# EAGLE board PCB_Rasp_Board (EAGLE 9.7.0), part 1 of 2
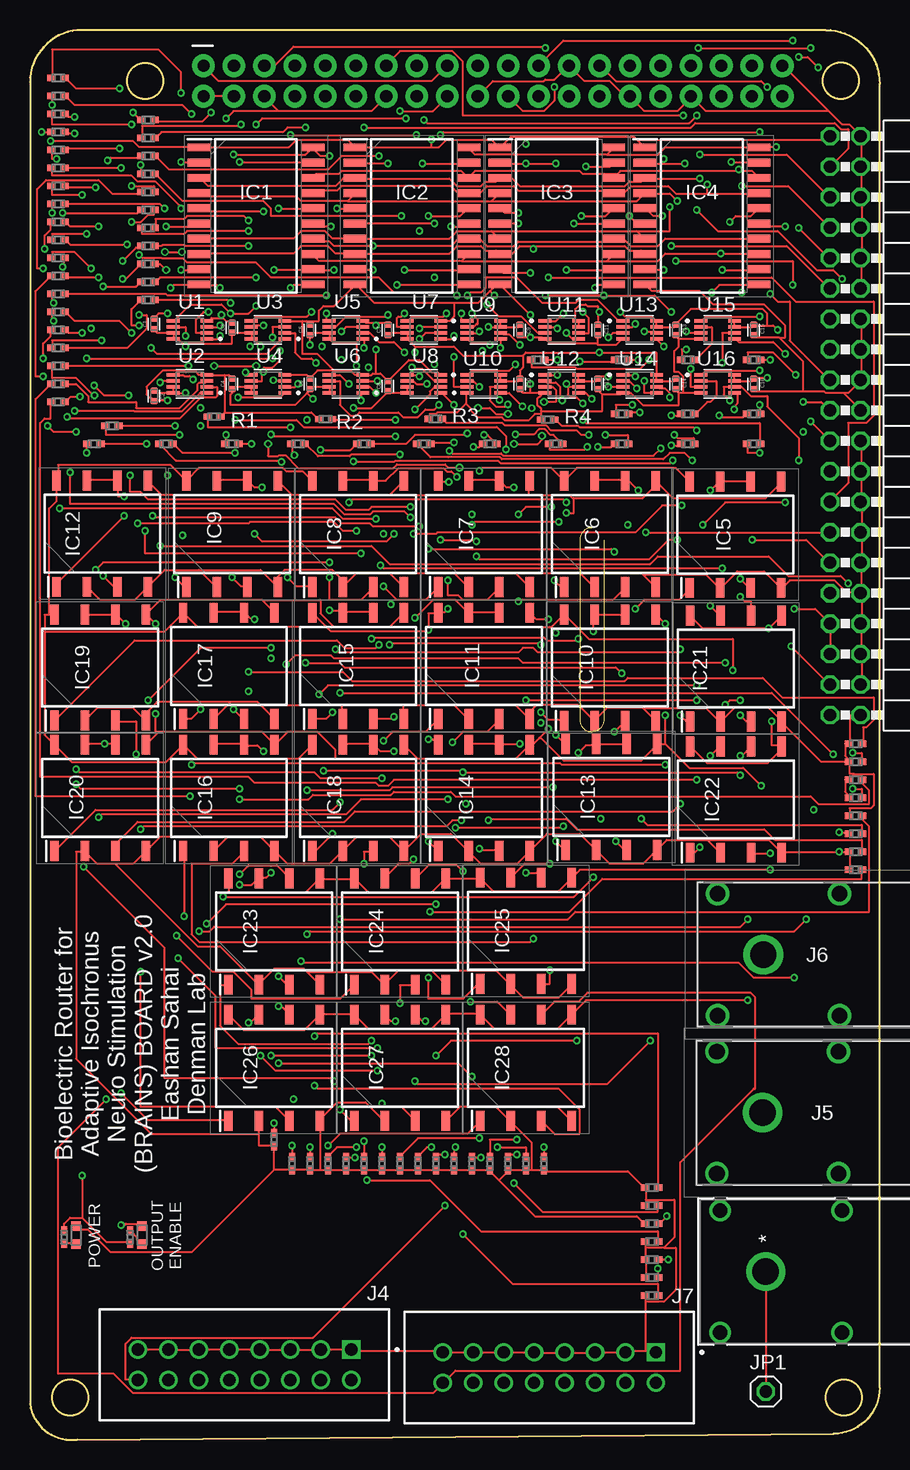
[diagram p0: board, top side]
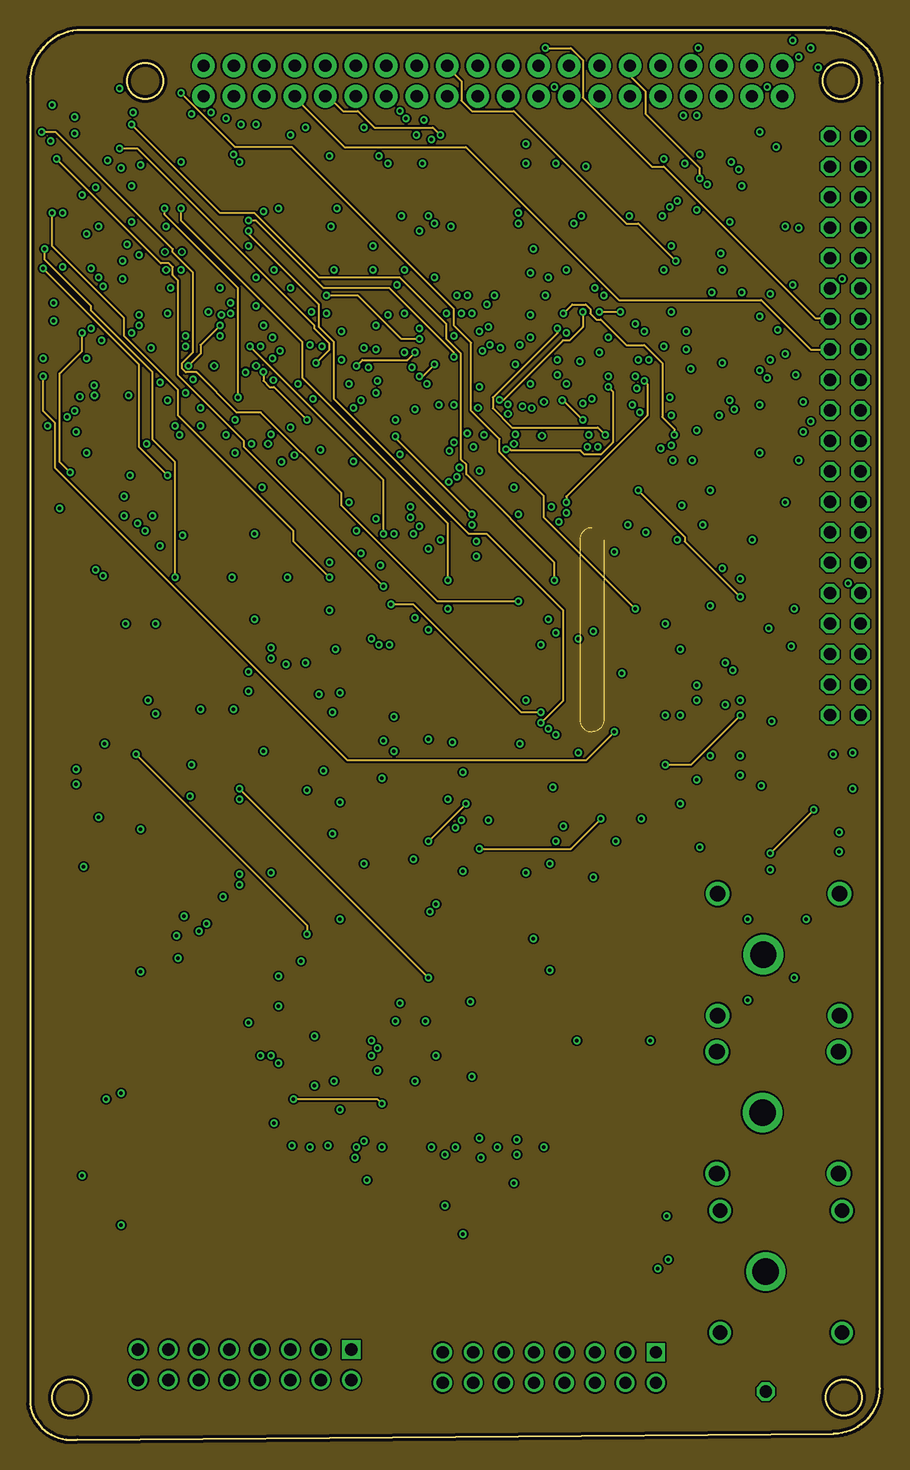
[diagram p1: board, inner layer Route2]
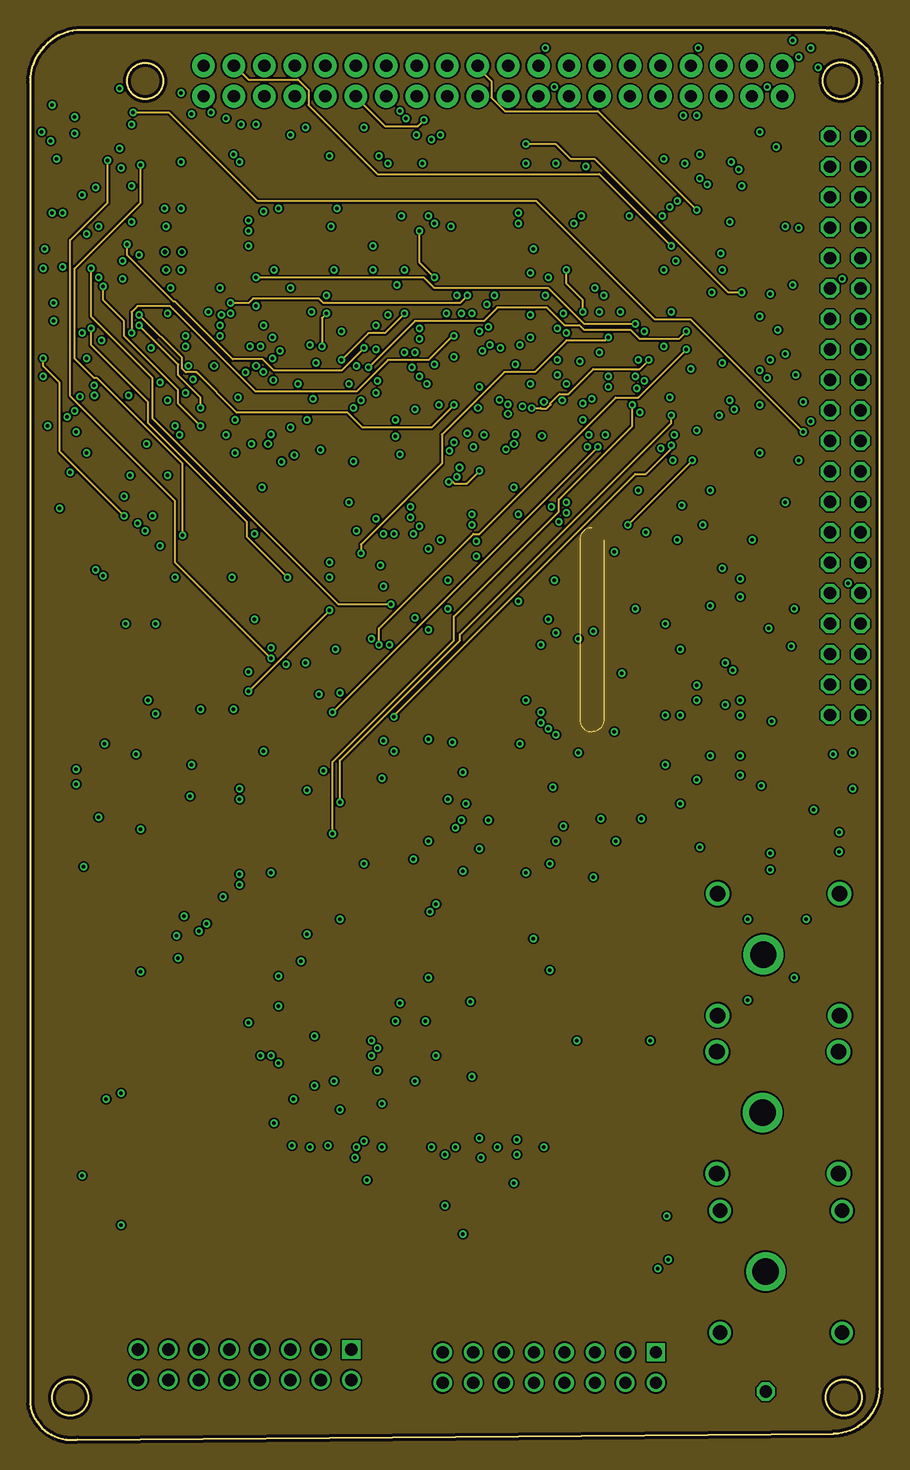
[diagram p2: board, inner layer Route15]
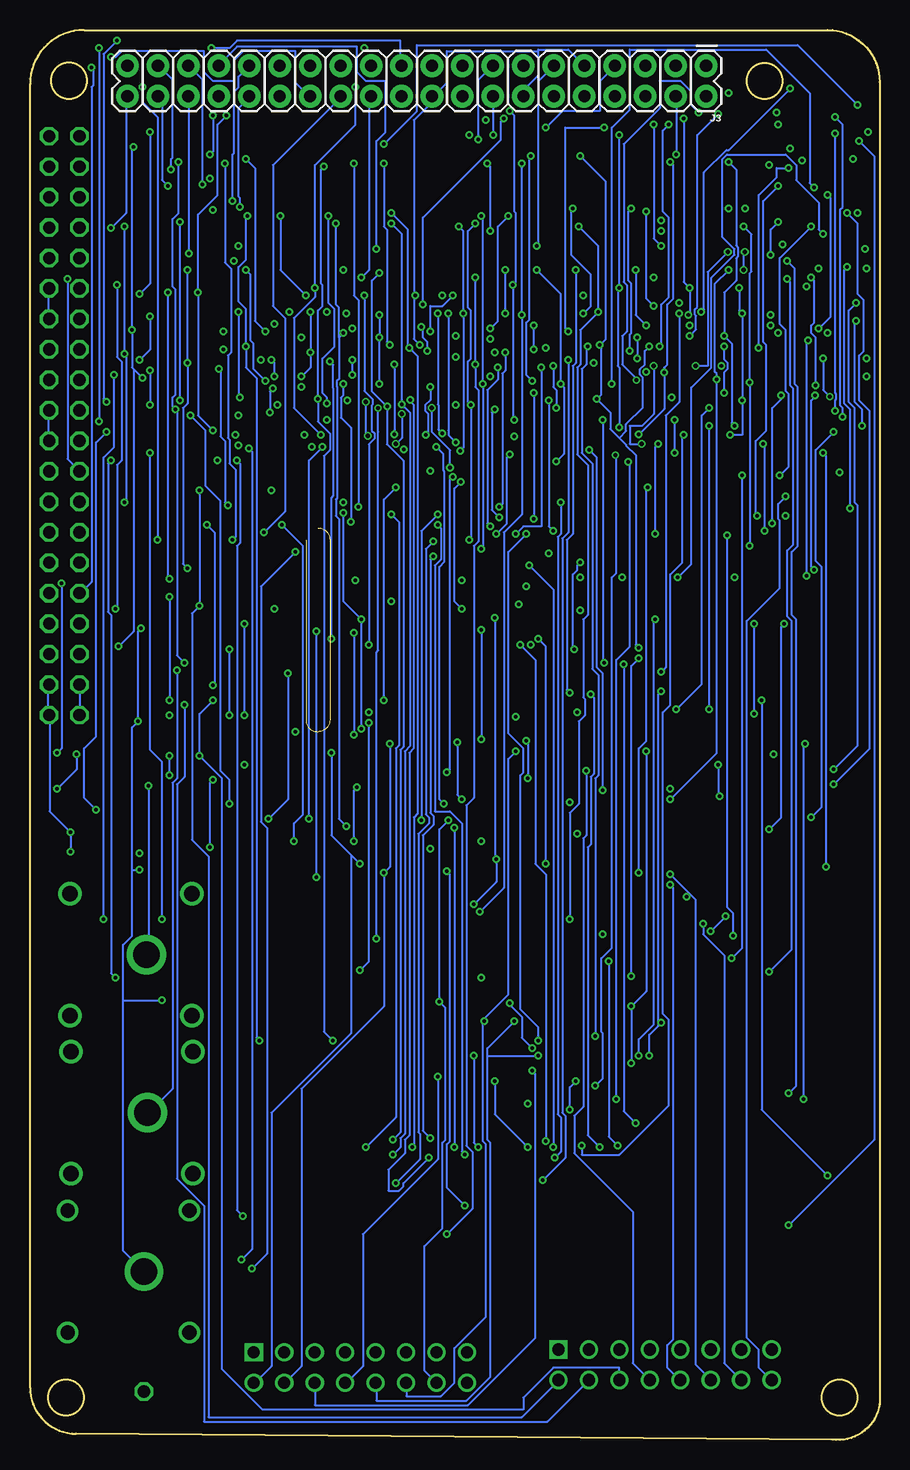
[diagram p3: board, bottom side, seen from below]

Size 70.85 x 117.53 mm. Coordinates in mm from the lower left corner, seen from the top.
Outline: 4.35,117.53 arc90 0,113.19 0,2.99 arc90 3.95,0.03 67.01,0.52 arc90 70.85,4.36 70.85,113.03 arc90 66.35,117.53 4.35,117.53
Outline: circle at 9.6,113.28 radius 1.5
Outline: circle at 3.35,3.53 radius 1.5
Outline: circle at 67.85,3.53 radius 1.5
Outline: circle at 67.6,113.29 radius 1.5
Copper layers (1*2+15*16): Top 0.035mm / dielectric 1.5mm / Route2 0.035mm / dielectric 0.15mm / Route15 0.035mm / dielectric 0.2mm / Bottom 0.035mm
Design rules "ITEADstudio_DRC *": minimum track width 6mil, minimum drill 12mil, track to track 6mil, track to pad 6mil, pad to pad 6mil, via to via 6mil, smd to smd 0mil, copper to edge 10mil, drill to drill 10mil, minimum pad ring 10mil, minimum via ring 6mil, stop-mask expansion 2mil, vias tented up to drill 100mil, thermal gap 10mil
Milling: 5 lines

## Footprints (pad centres in the part's own frame; a part is rotated, then mirrored left to right if it is on the bottom)
CAPC1005X55N = smd 0.54 x 0.6: 1 -0.43,0; 2 0.43,0
SOIC127P1030X265-20N = smd 1.95 x 0.65: 1 -4.725,5.715; 2 -4.725,4.445; 3 -4.725,3.175; 4 -4.725,1.905; 5 -4.725,0.635; 6 -4.725,-0.635; 7 -4.725,-1.905; 8 -4.725,-3.175; 9 -4.725,-4.445; 10 -4.725,-5.715; 11 4.725,-5.715; 12 4.725,-4.445; 13 4.725,-3.175; 14 4.725,-1.905; 15 4.725,-0.635; 16 4.725,0.635; 17 4.725,1.905; 18 4.725,3.175; 19 4.725,4.445; 20 4.725,5.715
SOP254P952X457-8N = smd 1.65 x 0.7: 1 -4.425,3.81; 2 -4.425,1.27; 3 -4.425,-1.27; 4 -4.425,-3.81; 5 4.425,-3.81; 6 4.425,-1.27; 7 4.425,1.27; 8 4.425,3.81
CONN_FCR7350G_CLF = drill 2.21 pad 2.718: 1 0,0 | drill 1.194 pad 1.702: 2 -5.08,6.36; 3 5.08,6.36; 4 -5.08,-3.8; 5 5.08,-3.8
2X20 = drill 1.016 pad 1.88: 1 0,0; 2 0,2.54; 3 2.54,0; 4 2.54,2.54; 5 5.08,0; 6 5.08,2.54; 7 7.62,0; 8 7.62,2.54; 9 10.16,0; 10 10.16,2.54; 11 12.7,0; 12 12.7,2.54; 13 15.24,0; 14 15.24,2.54; 15 17.78,0; 16 17.78,2.54; 17 20.32,0; 18 20.32,2.54; 19 22.86,0; 20 22.86,2.54; 21 25.4,0; 22 25.4,2.54; 23 27.94,0; 24 27.94,2.54; 25 30.48,0; 26 30.48,2.54; 27 33.02,0; 28 33.02,2.54; 29 35.56,0; 30 35.56,2.54; 31 38.1,0; 32 38.1,2.54; 33 40.64,0; 34 40.64,2.54; 35 43.18,0; 36 43.18,2.54; 37 45.72,0; 38 45.72,2.54; 39 48.26,0; 40 48.26,2.54
SAMTEC_TSS-108-01-G-D-LL = drill 1.02 pad 1.37 square: 01 0,0 | drill 1.02 pad 1.37: 02 0,2.54; 03 2.54,0; 04 2.54,2.54; 05 5.08,0; 06 5.08,2.54; 07 7.62,0; 08 7.62,2.54; 09 10.16,0; 10 10.16,2.54; 11 12.7,0; 12 12.7,2.54; 13 15.24,0; 14 15.24,2.54; 15 17.78,0; 16 17.78,2.54
730990 = drill 1.3 pad 1.95: 1 0,0; 2 0,-10.16; 3 10.16,-10.16; 4 10.16,0 | drill 2.2 pad 3.3: 5 3.8,-5.08
1X01 = drill 1.016 octagon: 1 0,0
2X20/90 = drill 1.016 octagon: 1 -24.13,-6.35; 2 -24.13,-3.81; 3 -21.59,-6.35; 4 -21.59,-3.81; 5 -19.05,-6.35; 6 -19.05,-3.81; 7 -16.51,-6.35; 8 -16.51,-3.81; 9 -13.97,-6.35; 10 -13.97,-3.81; 11 -11.43,-6.35; 12 -11.43,-3.81; 13 -8.89,-6.35; 14 -8.89,-3.81; 15 -6.35,-6.35; 16 -6.35,-3.81; 17 -3.81,-6.35; 18 -3.81,-3.81; 19 -1.27,-6.35; 20 -1.27,-3.81; 21 1.27,-6.35; 22 1.27,-3.81; 23 3.81,-6.35; 24 3.81,-3.81; 25 6.35,-6.35; 26 6.35,-3.81; 27 8.89,-6.35; 28 8.89,-3.81; 29 11.43,-6.35; 30 11.43,-3.81; 31 13.97,-6.35; 32 13.97,-3.81; 33 16.51,-6.35; 34 16.51,-3.81; 35 19.05,-6.35; 36 19.05,-3.81; 37 21.59,-6.35; 38 21.59,-3.81; 39 24.13,-6.35; 40 24.13,-3.81
LED_LTST-C190CKT_LTO = smd 0.787 x 0.787: 1 -0.749,0; 2 0.749,0
RC0402N_YAG = smd 0.66 x 0.508: 1 -0.559,0; 2 0.559,0
SOP50P310X90-8N = smd 1.12 x 0.27: 1 -1.405,0.75; 2 -1.405,0.25; 3 -1.405,-0.25; 4 -1.405,-0.75; 5 1.405,-0.75; 6 1.405,-0.25; 7 1.405,0.25; 8 1.405,0.75

## Placement (x,y rotation side)
C1  CL05A104KA5NNNC  [CAPC1005X55N]  10.35,93.03 270 top
C2  CL05A104KA5NNNC  [CAPC1005X55N]  10.35,87.03 90 top
C3  CL05A104KA5NNNC  [CAPC1005X55N]  16.85,92.72 270 top
C4  CL05A104KA5NNNC  [CAPC1005X55N]  16.85,88.03 270 top
C5  CL05A104KA5NNNC  [CAPC1005X55N]  23.35,92.53 270 top
C6  CL05A104KA5NNNC  [CAPC1005X55N]  23.35,88.03 270 top
C7  CL05A104KA5NNNC  [CAPC1005X55N]  29.85,92.53 270 top
C8  CL05A104KA5NNNC  [CAPC1005X55N]  29.85,87.85 270 top
C9  CL05A104KA5NNNC  [CAPC1005X55N]  40.85,92.53 90 top
C10  CL05A104KA5NNNC  [CAPC1005X55N]  40.85,88.03 90 top
C11  CL05A104KA5NNNC  [CAPC1005X55N]  47.35,92.53 90 top
C12  CL05A104KA5NNNC  [CAPC1005X55N]  47.35,88.03 90 top
C13  CL05A104KA5NNNC  [CAPC1005X55N]  53.85,92.53 90 top
C14  CL05A104KA5NNNC  [CAPC1005X55N]  53.85,88.03 90 top
C15  CL05A104KA5NNNC  [CAPC1005X55N]  60.35,92.53 90 top
C16  CL05A104KA5NNNC  [CAPC1005X55N]  60.35,88.03 90 top
IC1  CY74FCT373TSOC  [SOIC127P1030X265-20N]  18.85,102.03 0 top
IC2  CY74FCT373TSOC  [SOIC127P1030X265-20N]  31.85,102.03 0 top
IC3  CY74FCT373TSOC  [SOIC127P1030X265-20N]  43.92,102.03 0 top
IC4  CY74FCT373TSOC  [SOIC127P1030X265-20N]  56.02,102.03 0 top
IC5  PAA193STR  [SOP254P952X457-8N]  58.81,75.46 90 top
IC6  PAA193STR  [SOP254P952X457-8N]  48.35,75.53 90 top
IC7  PAA193STR  [SOP254P952X457-8N]  37.85,75.53 90 top
IC8  PAA193STR  [SOP254P952X457-8N]  27.35,75.53 90 top
IC9  PAA193STR  [SOP254P952X457-8N]  16.85,75.53 90 top
IC10  PAA193STR  [SOP254P952X457-8N]  48.35,64.38 90 top
IC11  PAA193STR  [SOP254P952X457-8N]  37.85,64.53 90 top
IC12  PAA193STR  [SOP254P952X457-8N]  6.03,75.54 90 top
IC13  PAA193STR  [SOP254P952X457-8N]  48.49,53.6 90 top
IC14  PAA193STR  [SOP254P952X457-8N]  37.85,53.53 90 top
IC15  PAA193STR  [SOP254P952X457-8N]  27.35,64.53 90 top
IC16  PAA193STR  [SOP254P952X457-8N]  16.58,53.53 90 top
IC17  PAA193STR  [SOP254P952X457-8N]  16.58,64.53 90 top
IC18  PAA193STR  [SOP254P952X457-8N]  27.35,53.53 90 top
IC19  PAA193STR  [SOP254P952X457-8N]  5.84,64.38 90 top
IC20  PAA193STR  [SOP254P952X457-8N]  5.85,53.53 90 top
IC21  PAA193STR  [SOP254P952X457-8N]  58.85,64.31 90 top
IC22  PAA193STR  [SOP254P952X457-8N]  58.85,53.38 90 top
IC23  PAA193STR  [SOP254P952X457-8N]  20.35,42.38 90 top
IC24  PAA193STR  [SOP254P952X457-8N]  30.85,42.38 90 top
IC25  PAA193STR  [SOP254P952X457-8N]  41.35,42.44 90 top
IC26  PAA193STR  [SOP254P952X457-8N]  20.35,31.03 90 top
IC27  PAA193STR  [SOP254P952X457-8N]  30.85,31.03 90 top
IC28  PAA193STR  [SOP254P952X457-8N]  41.35,31.03 90 top
J2  FCR7350GCONN_FCR7350G_CLF  [CONN_FCR7350G_CLF]  61.35,14.03 270 top
J3  RASPBERRYPI-40-PIN-GPIO_PTH_NO_SHROUD  [2X20]  14.47,114.55 180 bottom
J4  TSS-108-01-G-D-LL  [SAMTEC_TSS-108-01-G-D-LL]  26.78,7.54 180 top
J5  73099-0  [730990]  57.27,32.36 0 top
J6  73099-0  [730990]  57.35,45.53 0 top
J7  TSS-108-01-G-D-LL  [SAMTEC_TSS-108-01-G-D-LL]  52.19,7.3 180 top
JP1  PINHD-1X1  [1X01]  61.35,4.03 0 top
JP4  PINHD-2X20/90  [2X20/90]  73.07,84.55 270 top
OUTPUT_ENABLE  LTST-C190GKTLED_LTST-C190CKT_LTO  [LED_LTST-C190CKT_LTO]  9.35,17.08 270 top
POWER  LTST-C190GKTLED_LTST-C190CKT_LTO  [LED_LTST-C190CKT_LTO]  3.85,17.08 270 top
R1  1K  [RC0402N_YAG]  15.35,85.31 180 top
R2  1K  [RC0402N_YAG]  24.65,85.09 0 top
R3  1K  [RC0402N_YAG]  33.8,85.12 0 top
R4  RC0402JR-071KLRC0402N_YAG  [RC0402N_YAG]  43.17,85.06 0 top
R6  1K  [RC0402N_YAG]  2.35,113.53 0 top
R7  1K  [RC0402N_YAG]  2.35,112.03 0 top
R8  1K  [RC0402N_YAG]  2.35,110.53 0 top
R9  1K  [RC0402N_YAG]  2.35,109.03 0 top
R10  1K  [RC0402N_YAG]  2.35,107.53 0 top
R11  1K  [RC0402N_YAG]  2.35,106.03 0 top
R12  1K  [RC0402N_YAG]  2.35,104.53 0 top
R13  1K  [RC0402N_YAG]  2.35,103.03 0 top
R14  1K  [RC0402N_YAG]  2.35,101.53 0 top
R15  1K  [RC0402N_YAG]  2.35,100.03 0 top
R16  1K  [RC0402N_YAG]  2.35,98.53 0 top
R17  1K  [RC0402N_YAG]  2.35,97.03 0 top
R18  1K  [RC0402N_YAG]  2.35,95.53 0 top
R19  1K  [RC0402N_YAG]  2.35,94.03 0 top
R20  1K  [RC0402N_YAG]  2.35,92.53 0 top
R21  1K  [RC0402N_YAG]  2.35,91.03 0 top
R22  1K  [RC0402N_YAG]  2.35,89.53 0 top
R23  1K  [RC0402N_YAG]  2.35,88.03 0 top
R24  1K  [RC0402N_YAG]  2.35,86.53 0 top
R25  1K  [RC0402N_YAG]  9.85,110.03 0 top
R26  1K  [RC0402N_YAG]  9.85,108.53 0 top
R27  1K  [RC0402N_YAG]  9.85,107.03 0 top
R28  1K  [RC0402N_YAG]  9.85,105.53 0 top
R29  1K  [RC0402N_YAG]  9.85,104.03 0 top
R30  1K  [RC0402N_YAG]  9.85,102.53 0 top
R31  1K  [RC0402N_YAG]  9.85,101.03 0 top
R32  1K  [RC0402N_YAG]  9.85,99.53 0 top
R33  1K  [RC0402N_YAG]  9.85,98.03 0 top
R34  1K  [RC0402N_YAG]  5.35,83.03 0 top
R35  1K  [RC0402N_YAG]  11.35,83.03 0 top
R36  1K  [RC0402N_YAG]  16.85,83.03 0 top
R37  1K  [RC0402N_YAG]  22.35,83.03 0 top
R38  1K  [RC0402N_YAG]  27.85,83.03 0 top
R39  1K  [RC0402N_YAG]  32.85,83.03 0 top
R40  1K  [RC0402N_YAG]  38.35,83.03 0 top
R41  1K  [RC0402N_YAG]  43.85,83.03 0 top
R42  1K  [RC0402N_YAG]  49.35,83.03 0 top
R43  1K  [RC0402N_YAG]  54.85,83.03 0 top
R44  1K  [RC0402N_YAG]  60.35,83.03 0 top
R45  1K  [RC0402N_YAG]  42.35,90.03 0 top
R46  1K  [RC0402N_YAG]  9.85,96.53 0 top
R47  1K  [RC0402N_YAG]  9.85,95.03 0 top
R48  1K  [RC0402N_YAG]  49.35,85.53 0 top
R49  1K  [RC0402N_YAG]  49.35,90.03 0 top
R50  1K  [RC0402N_YAG]  54.85,90.03 0 top
R51  1K  [RC0402N_YAG]  60.35,90.03 0 top
R52  1K  [RC0402N_YAG]  54.85,85.53 0 top
R53  1K  [RC0402N_YAG]  60.35,85.53 0 top
R54  1K  [RC0402N_YAG]  2.85,16.9 270 top
R55  1K  [RC0402N_YAG]  6.85,84.53 0 top
R56  1K  [RC0402N_YAG]  68.85,58.03 0 top
R57  1K  [RC0402N_YAG]  68.85,56.53 0 top
R58  1K  [RC0402N_YAG]  68.85,55.03 0 top
R59  1K  [RC0402N_YAG]  8.35,16.9 270 top
R60  1K  [RC0402N_YAG]  68.85,53.53 0 top
R61  1K  [RC0402N_YAG]  68.85,52.03 0 top
R62  1K  [RC0402N_YAG]  68.85,50.53 0 top
R63  1K  [RC0402N_YAG]  68.85,49.03 0 top
R64  1K  [RC0402N_YAG]  68.85,47.53 0 top
R65  1K  [RC0402N_YAG]  51.85,21.03 0 top
R66  1K  [RC0402N_YAG]  51.85,19.53 0 top
R67  1K  [RC0402N_YAG]  51.85,18.03 0 top
R68  1K  [RC0402N_YAG]  51.85,16.53 0 top
R69  1K  [RC0402N_YAG]  51.85,15.03 0 top
R70  1K  [RC0402N_YAG]  51.85,13.53 0 top
R71  1K  [RC0402N_YAG]  51.85,12.03 0 top
R72  1K  [RC0402N_YAG]  42.85,23.03 90 top
R73  1K  [RC0402N_YAG]  41.35,23.03 90 top
R74  1K  [RC0402N_YAG]  39.85,23.03 90 top
R75  1K  [RC0402N_YAG]  38.35,23.03 90 top
R76  1K  [RC0402N_YAG]  36.85,23.03 90 top
R77  1K  [RC0402N_YAG]  35.35,23.03 90 top
R78  1K  [RC0402N_YAG]  33.85,23.03 90 top
R79  1K  [RC0402N_YAG]  32.35,23.03 90 top
R80  1K  [RC0402N_YAG]  30.85,23.03 90 top
R81  1K  [RC0402N_YAG]  29.35,23.03 90 top
R82  1K  [RC0402N_YAG]  27.85,23.03 90 top
R83  1K  [RC0402N_YAG]  26.35,23.03 90 top
R84  1K  [RC0402N_YAG]  24.85,23.03 90 top
R85  1K  [RC0402N_YAG]  23.35,23.03 90 top
R86  1K  [RC0402N_YAG]  21.85,23.03 90 top
R87  1K  [RC0402N_YAG]  20.35,25.03 90 top
U1  TS5A3359DCUR  [SOP50P310X90-8N]  13.35,92.53 180 top
U2  TS5A3359DCUR  [SOP50P310X90-8N]  13.35,88.03 180 top
U3  TS5A3359DCUR  [SOP50P310X90-8N]  19.85,92.53 180 top
U4  TS5A3359DCUR  [SOP50P310X90-8N]  19.85,88.03 180 top
U5  TS5A3359DCUR  [SOP50P310X90-8N]  26.35,92.53 180 top
U6  TS5A3359DCUR  [SOP50P310X90-8N]  26.35,88.03 180 top
U7  TS5A3359DCUR  [SOP50P310X90-8N]  32.85,92.53 180 top
U8  TS5A3359DCUR  [SOP50P310X90-8N]  32.85,88.03 180 top
U9  TS5A3359DCUR  [SOP50P310X90-8N]  37.85,92.53 0 top
U10  TS5A3359DCUR  [SOP50P310X90-8N]  37.85,88.03 0 top
U11  TS5A3359DCUR  [SOP50P310X90-8N]  44.35,92.53 0 top
U12  TS5A3359DCUR  [SOP50P310X90-8N]  44.35,88.03 0 top
U13  TS5A3359DCUR  [SOP50P310X90-8N]  50.85,92.53 0 top
U14  TS5A3359DCUR  [SOP50P310X90-8N]  50.85,88.03 0 top
U15  TS5A3359DCUR  [SOP50P310X90-8N]  57.35,92.53 0 top
U16  TS5A3359DCUR  [SOP50P310X90-8N]  57.35,88.03 0 top

## Library data of the parts
C1-C16 = CL05A104KA5NNNC; AVAILABILITY: In Stock; CHECK_PRICES: https://www.snapeda.com/parts/CL05A104KA5NNNC/Samsung+Electro-Mechanics/view-part/?ref=eda; DESCRIPTION: 0.1 µF ±10% 25V Ceramic Capacitor X5R 0402 (1005 Metric); MF: Samsung Electro-Mechanics; MP: CL05A104KA5NNNC; PACKAGE: 0402 Samsung; PRICE: None; PURCHASE-URL: https://pricing.snapeda.com/search?q=CL05A104KA5NNNC&ref=eda; SNAPEDA_LINK: https://www.snapeda.com/parts/CL05A104KA5NNNC/Samsung+Electro-Mechanics/view-part/?ref=snap
IC1-IC4 = CY74FCT373SOC-Local; DESCRIPTION: Octal Transparent D-Type Latches with 3-State Outputs; HEIGHT: 2.65mm; MANUFACTURER_NAME: Texas Instruments; MANUFACTURER_PART_NUMBER: CY74FCT373TSOC
IC5-IC28 = PAA193STR-Local; DESCRIPTION: Solid State Relay 50mA 1.4V DC-IN 0.1A 600V AC/DC-OUT 8-Pin PDIP SMD T/R; HEIGHT: 4.572mm; MANUFACTURER_NAME: LITTELFUSE; MANUFACTURER_PART_NUMBER: PAA193STR; MOUSER_PART_NUMBER: 849-PAA193STR; MOUSER_PRICE-STOCK: https://www.mouser.com/Search/Refine.aspx?Keyword=849-PAA193STR
J2 = FCR7350G; COPYRIGHT: Copyright (C) 2024 Ultra Librarian. All rights reserved.; MANUFACTURER_PART_NUMBER: FCR7350G; MFR_NAME: Cliff
J3 = SparkFun-Connectors-Local; SPICEPREFIX: X
J4 J7 = TSS-108-01-G-D-LL-Local
J5 J6 = 73099-0-Local; DESCRIPTION: Test Plugs & Test Jacks RT ANG 4mm MOUNTING SAFETY JACK PCB BLK; HEIGHT: 11.5mm; MANUFACTURER_NAME: Pomona Electronics; MANUFACTURER_PART_NUMBER: 73099-0; MOUSER_PART_NUMBER: 565-73099-0; MOUSER_PRICE-STOCK: https://www.mouser.co.uk/ProductDetail/Pomona-Electronics/73099-0?qs=B6kkDfuK7%2FDgwxUVoyhL3Q%3D%3D
JP1 = Connector; CATEGORY: Headers; DESCRIPTION: Header, Straight, 1 Position; MANUFACTURER: Generic; MPN: Generic; OPERATING_TEMPERATURE: Generic; PART_STATUS: Active; PITCH: 0.100" (2.54mm); ROHS_COMPLIANCE: Generic; SERIES: Generic; SUB-CATEGORY: Headers, Male Pins; TYPE: Board to Board or Cable, Unshrouded, Through Hole, Straight
JP4 = Connector; CATEGORY: Headers; DESCRIPTION: Header, Right Angle, 2x20 Position; MANUFACTURER: Generic; MPN: Generic; OPERATING_TEMPERATURE: Generic; PART_STATUS: Active; PITCH: 0.100" (2.54mm); ROHS_COMPLIANCE: Generic; SERIES: Generic; SUB-CATEGORY: Headers, Male Pins; TYPE: Board to Board or Cable, Unshrouded, Through Hole, Right Angle
OUTPUT_ENABLE POWER = 2024-01-29_23-07-25_Library; COPYRIGHT: Copyright (C) 2024 Ultra Librarian. All rights reserved.; MANUFACTURER_PART_NUMBER: LTST-C190GKT; MFR_NAME: LITE-ON
R1-R4 R6-R87 = RC0402N_YAG_Local; COPYRIGHT: Copyright (C) 2023 Ultra Librarian. All rights reserved.; MANUFACTURER_PART_NUMBER: RC0402JR-071KL; MFR_NAME: Yageo
U1-U16 = Library

## Nets
2: OUTPUT_ENABLE.2 R59.1
3.3V: J3.1 J3.17 JP4.33 JP4.35
A-CTRL1: R6.2 U1.2
A-CTRL2: R8.2 U2.2
A-CTRL3: R10.2 U3.2
A-CTRL4: R12.2 U4.2
A-CTRL5: R14.2 U5.2
A-CTRL6: R16.2 U6.2
A-CTRL7: R18.2 U7.2
A-CTRL8: R20.2 U8.2
A-CTRL9: R38.2 U9.2
A-CTRL10: R40.2 U10.2
A-CTRL11: R42.2 U11.2
A-CTRL12: R44.2 U12.2
A-CTRL13: R46.2 U13.2
A-CTRL14: R48.2 U14.2
A-CTRL15: R50.2 U15.2
A-CTRL16: R52.2 U16.2
ANODE: IC5.8 IC6.8 IC7.8 IC8.8 IC9.8 IC10.8 IC11.8 IC12.8 IC13.8 IC14.8 IC15.8 IC16.8 IC17.8 IC18.8 IC19.8 IC20.8 J5.5
C-CTRL1: R7.2 U1.1
C-CTRL2: R9.2 U2.1
C-CTRL3: R11.2 U3.1
C-CTRL4: R13.2 U4.1
C-CTRL5: R15.2 U5.1
C-CTRL6: R17.2 U6.1
C-CTRL7: R19.2 U7.1
C-CTRL8: R21.2 U8.1
C-CTRL9: R39.2 U9.1
C-CTRL10: R41.2 U10.1
C-CTRL11: R43.2 U11.1
C-CTRL12: R45.2 U12.1
C-CTRL13: R47.2 U13.1
C-CTRL14: R49.2 U14.1
C-CTRL15: R51.2 U15.1
C-CTRL16: R53.2 U16.1
CATHODE: IC5.5 IC6.5 IC7.5 IC8.5 IC9.5 IC10.5 IC11.5 IC12.5 IC13.5 IC14.5 IC15.5 IC16.5 IC17.5 IC18.5 IC19.5 IC20.5 J6.5
CE0: J3.24 JP4.25
CE1: J3.26 JP4.27
ESP1: IC5.6 IC5.7 IC21.7 J4.02
ESP2: IC6.6 IC6.7 IC21.6 J4.04
ESP3: IC7.6 IC7.7 IC22.7 J4.06
ESP4: IC8.6 IC8.7 IC22.6 J4.08
ESP5: IC9.6 IC9.7 IC23.7 J4.10
ESP6: IC10.6 IC10.7 IC23.6 J4.12
ESP7: IC11.6 IC11.7 IC24.7 J4.14
ESP8: IC12.6 IC12.7 IC24.6 J4.16
ESP9: IC13.6 IC13.7 IC25.7 J7.02
ESP10: IC14.6 IC14.7 IC25.6 J7.04
ESP11: IC15.6 IC15.7 IC26.7 J7.06
ESP12: IC16.6 IC16.7 IC26.6 J7.08
ESP13: IC17.6 IC17.7 IC27.7 J7.10
ESP14: IC18.6 IC18.7 IC27.6 J7.12
ESP15: IC19.6 IC19.7 IC28.7 J7.14
ESP16: IC20.6 IC20.7 IC28.6 J7.16
GND: C1.1 C2.1 C3.1 C4.1 C5.1 C6.1 C7.1 C8.1 C9.1 C10.1 C11.1 C12.1 C13.1 C14.1 C15.1 C16.1 IC1.10 IC2.10 IC3.10 IC4.10 IC5.2 IC5.4 IC6.2 IC6.4 IC7.2 IC7.4 IC8.2 IC8.4 IC9.2 IC9.4 IC10.2 IC10.4 IC11.2 IC11.4 IC12.2 IC12.4 IC13.2 IC13.4 IC14.2 IC14.4 IC15.2 IC15.4 IC16.2 IC16.4 IC17.2 IC17.4 IC18.2 IC18.4 IC19.2 IC19.4 IC20.2 IC20.4 IC21.2 IC21.4 IC22.2 IC22.4 IC23.2 IC23.4 IC24.2 IC24.4 IC25.2 IC25.4 IC26.2 IC26.4 IC27.2 IC27.4 IC28.2 IC28.4 J3.6 J3.9 J3.14 J3.20 J3.25 J3.30 J3.34 J3.39 J4.01 J4.03 J4.05 J4.07 J4.09 J4.11 J4.13 J4.15 J7.01 J7.03 J7.05 J7.07 J7.09 J7.11 J7.13 J7.15 JP4.2 JP4.4 JP4.6 JP4.8 JP4.10 JP4.12 JP4.14 JP4.16 JP4.18 JP4.20 JP4.22 JP4.24 JP4.26 JP4.28 JP4.30 JP4.32 JP4.34 JP4.36 JP4.38 JP4.40 POWER.1 R1.1 R2.1 R3.1 R4.1 R55.1 R56.1 R57.1 R58.1 R60.1 R61.1 R62.1 R63.1 R64.1 R65.1 R66.1 R67.1 R68.1 R69.1 R70.1 R71.1 R72.1 R73.1 R74.1 R75.1 R76.1 R77.1 R78.1 R79.1 R80.1 R81.1 R82.1 R83.1 R84.1 R85.1 R86.1 R87.1 U1.4 U2.4 U3.4 U4.4 U5.4 U6.4 U7.4 U8.4 U9.4 U10.4 U11.4 U12.4 U13.4 U14.4 U15.4 U16.4
GND-CTRL1: R22.2 U1.3
GND-CTRL2: R23.2 U2.3
GND-CTRL3: R24.2 U3.3
GND-CTRL4: R25.2 U4.3
GND-CTRL5: R26.2 U5.3
GND-CTRL6: R27.2 U6.3
GND-CTRL7: R28.2 U7.3
GND-CTRL8: R29.2 U8.3
GND-CTRL9: R30.2 U9.3
GND-CTRL10: R31.2 U10.3
GND-CTRL11: R32.2 U11.3
GND-CTRL12: R33.2 U12.3
GND-CTRL13: R34.2 U13.3
GND-CTRL14: R35.2 U14.3
GND-CTRL15: R36.2 U15.3
GND-CTRL16: R37.2 U16.3
GP4: J3.7 JP4.3
GP5: IC1.3 IC2.3 IC3.3 IC4.3 J3.29
GP6: IC1.4 IC2.4 IC3.4 IC4.4 J3.31
GP12: IC1.7 IC2.7 IC3.7 IC4.7 J3.32
GP13: IC1.8 IC2.8 IC3.8 IC4.8 J3.33
GP16: IC1.13 IC2.13 IC3.13 IC4.13 J3.36
GP17: IC1.14 IC2.14 IC3.14 IC4.14 J3.11
GP18#: J3.12 JP4.5
GP19: IC1.17 IC2.17 IC3.17 IC4.17 J3.35
GP20: J3.38 JP4.7
GP21: J3.40 JP4.9
GP26: IC1.18 IC2.18 IC3.18 IC4.18 J3.37
ID_SC: J3.28 JP4.31
ID_SD: J3.27 JP4.29
LE1: IC1.11 J3.16 R1.2
LE2: IC2.11 J3.18 R2.2
LE3: IC3.11 J3.22 R3.2
LE4: IC4.11 J3.13 R4.2
MISO: J3.21 JP4.21
MOSI: J3.19 JP4.23
N$3: POWER.2 R54.2
N$4: IC5.1 R6.1
N$5: IC5.3 R7.1
N$6: IC6.1 R8.1
N$7: IC6.3 R9.1
N$8: IC7.1 R10.1
N$9: IC7.3 R11.1
N$10: IC8.1 R12.1
N$11: IC8.3 R13.1
N$12: IC9.1 R14.1
N$13: IC9.3 R15.1
N$14: IC10.1 R16.1
N$15: IC10.3 R17.1
N$16: IC11.1 R18.1
N$17: IC11.3 R19.1
N$18: IC12.1 R20.1
N$19: IC12.3 R21.1
N$20: IC21.1 R22.1
N$21: IC21.3 R23.1
N$22: IC22.1 R24.1
N$23: IC22.3 R25.1
N$24: IC23.1 R26.1
N$25: IC23.3 R27.1
N$26: IC24.1 R28.1
N$27: IC24.3 R29.1
N$28: IC25.1 R30.1
N$29: IC25.3 R31.1
N$30: IC26.1 R32.1
N$31: IC26.3 R33.1
N$32: IC27.1 R34.1
N$33: IC27.3 R35.1
N$34: IC28.1 R36.1
N$35: IC28.3 R37.1
N$36: IC13.1 R38.1
N$37: IC13.3 R39.1
N$38: IC14.1 R40.1
N$39: IC14.3 R41.1
N$40: IC15.1 R42.1
N$41: IC15.3 R43.1
N$42: IC16.1 R44.1
N$43: IC16.3 R45.1
N$44: IC17.1 R46.1
N$45: IC17.3 R47.1
N$46: IC18.1 R48.1
N$47: IC18.3 R49.1
N$48: IC19.1 R50.1
N$49: IC19.3 R51.1
N$50: IC20.1 R52.1
N$51: IC20.3 R53.1
O1: IC1.2 R55.2 U1.6
O2: IC1.5 R56.2 U1.5
O3: IC1.6 R57.2 U2.6
O4: IC1.9 R58.2 U2.5
O5: IC1.12 R60.2 U3.6
O6: IC1.15 R61.2 U3.5
O7: IC1.16 R62.2 U4.6
O8: IC1.19 R63.2 U4.5
O9: IC2.2 R64.2 U5.6
O10: IC2.5 R65.2 U5.5
O11: IC2.6 R66.2 U6.6
O12: IC2.9 R67.2 U6.5
O13: IC2.12 R68.2 U7.6
O14: IC2.15 R69.2 U7.5
O15: IC2.16 R70.2 U8.6
O16: IC2.19 R71.2 U8.5
O17: IC3.2 R72.2 U9.6
O18: IC3.5 R73.2 U9.5
O19: IC3.6 R74.2 U10.6
O20: IC3.9 R75.2 U10.5
O21: IC3.12 R76.2 U11.6
O22: IC3.15 R77.2 U11.5
O23: IC3.16 R78.2 U12.6
O24: IC3.19 R79.2 U12.5
O25: IC4.2 R80.2 U13.6
O26: IC4.5 R81.2 U13.5
O27: IC4.6 R82.2 U14.6
O28: IC4.9 R83.2 U14.5
O29: IC4.12 R84.2 U15.6
O30: IC4.15 R85.2 U15.5
O31: IC4.16 R86.2 U16.6
O32: IC4.19 R87.2 U16.5
OE: IC1.1 IC2.1 IC3.1 IC4.1 J3.15 JP4.1 OUTPUT_ENABLE.1
RXI: J3.10 JP4.17
SCL: J3.5 JP4.13
SCLK: J3.23 JP4.19
SDA: J3.3 JP4.11
SGND: IC21.5 IC21.8 IC22.5 IC22.8 IC23.5 IC23.8 IC24.5 IC24.8 IC25.5 IC25.8 IC26.5 IC26.8 IC27.5 IC27.8 IC28.5 IC28.8 J2.1 JP1.1
TXO: J3.8 JP4.15
VDD: C1.2 C2.2 C3.2 C4.2 C5.2 C6.2 C7.2 C8.2 C9.2 C10.2 C11.2 C12.2 C13.2 C14.2 C15.2 C16.2 IC1.20 IC2.20 IC3.20 IC4.20 J3.2 J3.4 JP4.37 JP4.39 R54.1 R59.2 U1.7 U1.8 U2.7 U2.8 U3.7 U3.8 U4.7 U4.8 U5.7 U5.8 U6.7 U6.8 U7.7 U7.8 U8.7 U8.8 U9.7 U9.8 U10.7 U10.8 U11.7 U11.8 U12.7 U12.8 U13.7 U13.8 U14.7 U14.8 U15.7 U15.8 U16.7 U16.8

## Tracks (layer width: path | path; a pad name or v marks a point on that pad's centre or on a via)
2
  Top 0.152: R59.1 8.65,17.16 8.9,16.91 8.9,16.73 8.95,16.69 8.99,16.69 OUTPUT_ENABLE.2
3.3V  (via drill 0.3)
  Top 0.152: JP4.35 66.72,65.53 JP4.33 66.6,68.16 65.47,69.28 v63.72,69.28 | J3.1 14.47,114.53 15.72,113.28 33.47,113.28 34.72,114.53 J3.17 | v63.6,96.28 63.6,98.28 v53.85,98.28
  Route2 0.152: v53.85,98.28 50.72,101.41 49.72,101.41 40.35,110.78 36.85,110.78 35.97,111.66 35.97,113.28 34.72,114.53 J3.17
  Bottom 0.152: v63.72,69.28 63.6,69.41 63.6,81.28 63.22,81.66 63.22,89.91 63.6,90.28 v63.6,96.28
A-CTRL1  (via drill 0.3)
  Top 0.152: v7.47,112.66 3.85,112.66 2.97,113.53 R6.2 | U1.2 13.85,92.28 13.85,93.41 14.47,94.03 v14.88,94.03
  Bottom 0.152: v7.47,112.66 12.6,107.53 12.78,107.53 14.65,105.66 14.65,94.26 v14.88,94.03
A-CTRL2  (via drill 0.3)
  Top 0.152: v3.72,110.28 3.22,110.28 2.97,110.53 R8.2 | v3.1,85.28 3.22,85.16 12.49,85.16 14.24,86.91 15.47,86.91 15.6,87.03 15.6,87.78 U2.2
  Bottom 0.152: v3.72,110.28 3.1,109.66 3.1,102.78 3.28,102.6 3.28,86.21 3.1,86.03 v3.1,85.28
A-CTRL3  (via drill 0.3)
  Top 0.152: v7.47,107.66 3.1,107.66 2.97,107.53 R10.2 | v23.85,89.78 23.47,90.16 22.6,90.16 22.1,90.66 22.1,92.28 U3.2
  Route2 0.152: v7.47,107.66 8.97,107.66 23.72,92.91 23.72,92.66 24.97,91.41 24.97,90.91 v23.85,89.78
A-CTRL4  (via drill 0.3)
  Top 0.152: v5.47,104.41 3.1,104.41 2.97,104.53 R12.2 | v22.35,88.03 22.1,87.78 U4.2
  Bottom 0.152: v5.47,104.41 5.85,104.78 5.85,112.28 9.47,115.91 20.85,115.91 20.85,110.91 22.35,109.41 v22.35,88.03
A-CTRL5  (via drill 0.3)
  Top 0.152: v5.72,101.16 3.35,101.16 2.97,101.53 R14.2 | v8.35,80.41 8.35,79.03 9.22,79.03 9.85,78.41 25.47,78.41 26.35,77.53 28.22,77.53 28.47,77.78 v31.72,77.78 | v31.22,90.66 30.35,91.53 29.1,91.53 28.35,92.28 U5.2
  Bottom 0.152: v5.72,101.16 8.35,98.53 8.35,93.03 7.85,92.53 7.85,87.45 7.6,87.2 7.6,81.16 v8.35,80.41 | v31.72,77.78 31.47,78.03 31.47,88.91 31.22,89.16 v31.22,90.66
A-CTRL6  (via drill 0.3)
  Top 0.152: v2.72,97.78 2.85,97.78 2.85,98.53 R16.2 | v2.47,77.66 25.22,77.66 26.1,76.78 v28.85,76.78 | v28.85,87.28 28.35,87.78 U6.2
  Bottom 0.152: v2.72,97.78 2.97,97.53 2.97,86.41 2.47,85.91 v2.47,77.66 | v28.85,87.28 v28.85,76.78
A-CTRL7  (via drill 0.3)
  Top 0.152: R18.2 11.35,95.53 11.47,95.41 v24.72,95.41 | v32.47,91.78 32.97,92.28 U7.2
  Route2 0.152: v24.72,95.41 27.35,95.41 30.97,91.78 v32.47,91.78
A-CTRL8  (via drill 0.3)
  Top 0.152: v4.35,92.28 3.22,92.28 2.97,92.53 R20.2 | v3.35,80.66 3.35,78.03 25.35,78.03 26.22,77.16 28.35,77.16 28.6,77.41 31.22,77.41 v31.72,76.91 | v32.1,85.91 33.35,87.16 33.35,87.41 33.72,87.78 U8.2
  Route2 0.152: v4.35,92.28 4.35,90.78 2.47,88.91 2.47,81.53 v3.35,80.66
  Bottom 0.152: v31.72,76.91 32.35,77.53 32.35,85.66 v32.1,85.91
A-CTRL9  (via drill 0.3)
  Top 0.152: R38.2 31.35,83.03 32.1,83.78 36.34,83.78 v36.47,83.91 | v36.85,93.91 37.35,93.41 37.35,93.03 37.22,93.03 36.97,92.78 U9.2
  Bottom 0.152: v36.85,93.91 36.85,86.32 36.79,86.26 36.79,84.23 v36.47,83.91
A-CTRL10  (via drill 0.3)
  Top 0.152: v37.47,87.78 36.97,88.28 U10.2 | R40.2 38.85,83.03 38.85,83.1 38.16,83.78 v37.85,83.78
  Bottom 0.152: v37.85,83.78 37.65,83.98 37.65,85.55 37.9,85.8 37.9,86.26 37.47,86.69 v37.47,87.78
A-CTRL11  (via drill 0.3)
  Top 0.152: v47.97,83.78 49.85,83.78 49.85,83.03 R42.2 | v43.97,92.66 43.85,92.78 U11.2
  Route2 0.152: v47.97,83.78 47.35,84.41 40.19,84.41 38.6,86 38.6,86.91 43.97,92.28 v43.97,92.66
A-CTRL12  (via drill 0.3)
  Top 0.152: v46.1,85.03 46.35,84.78 60.85,84.78 60.85,83.03 R44.2 | U12.2 42.97,88.28 43.1,88.16 43.85,88.16 44.2,87.8 44.2,86.84 v44.38,86.66
  Route2 0.152: v46.1,85.03 44.47,86.66 v44.38,86.66
A-CTRL13  (via drill 0.3)
  Top 0.152: v18.85,96.91 10.85,96.91 10.47,96.53 R46.2 | v50.47,93.03 50.22,92.78 U13.2
  Route15 0.152: v18.85,96.91 32.85,96.91 33.72,96.03 43.22,96.03 46.22,93.03 v50.47,93.03
A-CTRL14  (via drill 0.3)
  Top 0.152: v50.85,85.66 50.1,85.66 49.97,85.53 R48.2 | v50.6,87.66 49.97,88.28 U14.2
  Bottom 0.152: v50.85,85.66 50.85,87.41 v50.6,87.66
A-CTRL15
  Top 0.152: U15.2 56.85,92.78 56.85,91.41 55.47,90.03 R50.2
A-CTRL16
  Top 0.152: U16.2 57.22,88.28 57.22,87.03 56.72,86.53 56.47,86.53 55.47,85.53 R52.2
ANODE  (via drill 0.3)
  Top 0.152: IC18.8 23.47,57.91 22.35,56.78 13.97,56.78 12.85,57.91 IC16.8 12.72,57.91 11.35,56.53 3.47,56.53 2.1,57.91 IC20.8 1.97,58.03 1.22,58.78 1.22,67.41 | 1.22,67.41 1.22,68.78 1.6,68.78 | 1.6,68.78 1.97,68.78 IC19.8 | 1.22,67.41 11.22,67.41 12.72,68.91 IC17.8 12.85,68.91 13.97,67.78 24.72,67.78 | 1.6,68.78 1.6,77.66 2.22,78.28 2.22,79.91 IC12.8 2.35,80.03 2.35,81.28 11.72,81.28 12.97,80.03 IC9.8 13.1,80.03 14.08,81.01 21.1,81.01 21.39,80.73 22.77,80.73 IC8.8 | IC5.8 54.97,79.91 53.85,81.03 45.6,81.03 44.6,80.03 IC6.8 44.47,80.03 43.47,81.03 37.72,81.03 v37.47,80.78 | v33.22,58.41 33.6,58.41 33.97,58.03 IC14.8 | 33.22,67.78 33.22,68.91 33.97,68.91 IC11.8 34.1,69.03 34.6,69.03 v34.85,69.28 | 33.22,67.78 43.35,67.78 | 43.35,67.78 43.47,67.78 44.47,68.78 IC10.8 44.6,68.78 46.6,66.78 58.6,66.78 v58.6,64.16 | 33.22,67.78 v33.22,67.53 33.1,67.41 25.1,67.41 24.72,67.78 | v43.85,58.78 44.6,58.03 IC13.8 | 43.35,67.78 v43.85,67.28 | 24.72,67.78 23.6,68.91 IC15.8 | IC7.8 34.09,79.91 34.88,79.91 v34.93,79.86
  Route15 0.152: v34.93,79.86 35.25,79.86 35.38,79.74 36.43,79.74 v37.47,80.78
  Bottom 0.152: v33.22,67.53 v33.22,58.41 | v43.85,67.28 v43.85,58.78 | v34.85,69.28 35.47,69.91 35.47,79.32 v34.93,79.86 | v58.6,64.16 58.6,55.16 58.97,54.78 58.97,29.28 60.97,27.28 J5.5
C-CTRL1  (via drill 0.3)
  Top 0.152: v13.47,110.53 12.72,111.28 3.72,111.28 2.97,112.03 R7.2 | v15.85,92.03 15.6,91.78 U1.1
  Bottom 0.152: v13.47,110.53 15.22,108.78 15.22,94.45 15.41,94.25 15.41,93.81 15.31,93.71 15.31,92.57 v15.85,92.03
C-CTRL2  (via drill 0.3)
  Top 0.152: v3.72,108.91 3.1,108.91 2.97,109.03 R9.2 | v3.72,85.78 8.67,85.78 8.72,85.73 12.63,85.73 14.18,87.28 U2.1
  Bottom 0.152: v3.72,85.78 3.72,86.65 3.62,86.75 3.62,87.19 3.72,87.29 v3.72,108.91
C-CTRL3  (via drill 0.3)
  Top 0.152: v7.6,106.03 R11.2 | v10.1,91.03 10.6,90.53 19.72,90.53 20.97,91.78 U3.1
  Bottom 0.152: v7.6,106.03 8.6,106.03 8.6,105.28 10.1,103.78 v10.1,91.03
C-CTRL4  (via drill 0.3)
  Top 0.152: R13.2 10.85,103.03 v11.22,102.66 | v17.35,86.91 20.85,86.91 21.22,87.28 U4.1
  Route2 0.152: v11.22,102.66 11.22,102.16 17.35,96.03 v17.35,86.91
C-CTRL5  (via drill 0.3)
  Top 0.152: v8.1,99.66 3.35,99.66 2.97,100.03 R15.2 | v27.85,91.03 27.85,91.78 U5.1
  Route15 0.152: v8.1,99.66 8.1,98.78 11.97,94.91 12.1,94.91 16.92,90.09 19.42,90.09 20.35,89.16 25.97,89.16 v27.85,91.03
C-CTRL6  (via drill 0.3)
  Top 0.152: v5.72,96.91 3.1,96.91 2.97,97.03 R17.2 | v8.97,76.41 18.22,76.41 18.35,76.53 25.35,76.53 26.1,75.78 v27.22,75.78 | v27.6,86.66 27.6,87.28 U6.1 | v8.22,87.07 6.19,87.07 v5.35,87.91
  Bottom 0.152: v5.72,96.91 5.47,96.66 5.47,93.16 5.72,92.91 5.72,92.28 5.35,91.91 v5.35,87.91 | v8.97,76.41 8.97,86.03 8.22,86.78 v8.22,87.07 | v27.22,75.78 27.6,76.16 v27.6,86.66
C-CTRL7  (via drill 0.3)
  Top 0.152: v8.47,92.28 7.47,93.28 3.72,93.28 2.97,94.03 R19.2 | v35.35,92.03 35.1,91.78 U7.1
  Route15 0.152: v8.47,92.28 8.47,94.03 8.97,94.53 11.68,94.53 18.81,87.41 27.22,87.41 29.85,90.03 33.22,90.03 35.22,92.03 v35.35,92.03
C-CTRL8  (via drill 0.3)
  Top 0.152: R21.2 8.1,91.03 9.72,92.66 9.72,93.78 v9.1,93.78 | v35.35,86.28 34.35,87.28 U8.1
  Route15 0.152: v35.35,86.28 33.47,84.41 27.72,84.41 26.47,85.66 17.22,85.66 13.88,89 12.98,89 12.67,89.31 12.67,90.21 v9.1,93.78
C-CTRL9  (via drill 0.3)
  Top 0.152: v35.97,93.91 35.97,93.28 U9.1 | R39.2 33.47,83.03 33.6,83.16 v35.35,83.16
  Bottom 0.152: v35.97,93.91 35.97,84.17 35.94,84.13 35.94,83.75 v35.35,83.16
C-CTRL10  (via drill 0.3)
  Top 0.152: v40.47,89.66 39.97,89.16 36.85,89.16 36.47,88.78 U10.1 | R41.2 44.35,83.03 44.35,83.1 43.66,83.78 43.38,83.78 42.92,84.25 42.46,84.25 42.02,83.82 v40.47,83.82
  Bottom 0.152: v40.47,89.66 v40.47,83.82
C-CTRL11  (via drill 0.3)
  Top 0.152: v53.72,83.78 53.97,83.53 55.35,83.53 55.35,83.03 R43.2 | v44.47,93.91 43.85,93.28 U11.1
  Route2 0.152: v53.72,83.78 53.72,84.28 52.72,85.28 52.72,89.78 51.22,91.28 49.72,91.28 47.6,93.41 47.22,93.41 46.72,93.91 46.72,94.28 46.35,94.66 45.22,94.66 v44.47,93.91
C-CTRL12  (via drill 0.3)
  Top 0.152: v43.97,90.03 R45.2 | U12.1 v43.97,88.78
  Bottom 0.152: v43.97,88.78 v43.97,90.03
C-CTRL13  (via drill 0.3)
  Top 0.152: R47.2 16.47,95.03 v16.72,94.78 | v36.47,95.41 36.72,95.66 37.6,95.66 37.97,96.03 37.97,96.91 40.6,96.91 42.72,94.78 45.47,94.78 45.72,95.03 47.35,95.03 49.1,93.28 U13.1
  Route15 0.152: v16.72,94.78 18.22,94.78 18.6,95.16 24.1,95.16 24.47,94.78 35.85,94.78 v36.47,95.41
C-CTRL14  (via drill 0.3)
  Top 0.152: v50.72,90.03 R49.2 | v50.47,88.66 50.35,88.78 U14.1
  Bottom 0.152: v50.72,90.03 50.47,89.78 v50.47,88.66
C-CTRL15  (via drill 0.3)
  Top 0.152: v61.72,90.03 R51.2 | v60.85,93.66 56.35,93.66 55.97,93.28 U15.1
  Bottom 0.152: v61.72,90.03 60.85,90.91 v60.85,93.66
C-CTRL16  (via drill 0.3)
  Top 0.152: v60.85,86.28 60.85,85.53 R53.2 | v60.85,89.16 56.35,89.16 55.97,88.78 U16.1
  Bottom 0.152: v60.85,89.16 v60.85,86.28
CATHODE  (via drill 0.3)
  Top 0.152: 52.35,79.78 52.22,79.91 IC6.5 52.35,79.78 | 52.35,79.78 53.6,78.53 61.35,78.53 62.6,79.78 IC5.5 | 21.85,78.78 20.72,79.91 IC9.5 | 29.97,78.78 21.85,78.78 | 29.97,78.78 31.1,79.91 IC8.5 | 21.85,78.78 10.97,78.78 9.85,79.91 IC12.5 | 41.6,78.78 41.6,79.91 IC7.5 | 29.97,78.78 41.6,78.78 | 52.35,79.78 51.1,78.53 45.35,78.53 | 45.35,78.53 45.22,78.53 44.97,78.78 41.6,78.78 | 19.35,70.03 10.85,70.03 9.72,68.91 IC19.5 9.72,68.78 v10.47,68.03 | 19.35,70.03 20.35,69.03 IC17.5 | 19.35,70.03 24.22,70.03 24.22,68.91 25.35,67.78 29.97,67.78 31.1,68.91 IC15.5 | 10.72,59.03 9.72,58.03 IC20.5 | 10.72,59.03 19.35,59.03 20.35,58.03 IC16.5 20.47,58.03 21.47,59.03 23.97,59.03 25.47,57.53 25.47,56.78 32.35,56.78 | 32.35,56.78 31.22,57.91 IC18.5 | 32.35,56.78 40.47,56.78 41.6,57.91 IC14.5 41.72,58.03 41.97,58.03 42.47,58.53 | v43.22,68.41 42.22,68.41 41.72,68.91 IC11.5 | 42.47,58.53 v43.22,59.28 | 42.47,58.53 42.6,58.53 44.47,56.66 50.97,56.66 52.22,57.91 IC13.5 52.35,58.03 52.97,58.03 | v52.97,68.03 52.22,68.78 IC10.5 | 52.97,58.03 v52.97,60.41 | v60.97,54.53 59.47,56.03 54.97,56.03 52.97,58.03 | v10.47,60.53 10.47,59.03 10.72,59.03 | 45.35,78.53 45.35,77.28 v44.72,77.28
  Bottom 0.152: v43.22,59.28 v43.22,68.41 44.72,69.91 v44.72,77.28 | v52.97,60.41 v52.97,68.03 | v60.97,54.53 60.97,40.66 61.1,40.53 J6.5 | v10.47,60.53 v10.47,68.03
CE0  (via drill 0.3)
  Top 0.152: v43.22,96.91 61.85,96.91 63.85,94.91 70.35,94.91 70.35,85.41 69.72,84.78 68.22,84.78 68.22,79.78 66.72,78.28 JP4.25
  Bottom 0.152: v43.22,96.91 42.6,97.53 42.6,111.78 42.47,111.91 J3.24
CE1  (via drill 0.3)
  Top 0.152: v51.35,75.66 66.6,75.66 JP4.27
  Bottom 0.152: v51.35,75.66 49.6,77.41 49.6,93.53 50.6,94.53 50.6,106.28 44.97,111.91 J3.26
ESP1  (via drill 0.3)
  Top 0.152: IC5.6 59.97,79.91 57.6,79.91 IC5.7 57.47,79.78 57.35,79.78 v56.72,79.16 | v56.72,69.53 57.47,68.78 IC21.7
  Bottom 0.152: v56.72,79.16 v56.72,69.53 57.35,68.91 57.35,50.03 55.97,48.66 55.97,1.91 29.85,1.91 26.85,4.91 J4.02
ESP2  (via drill 0.3)
  Top 0.152: IC6.7 47.1,80.03 49.6,80.03 IC6.6 49.72,79.91 49.97,79.91 v50.72,79.16 | v59.22,70.28 59.6,69.91 60.1,69.91 60.1,68.78 IC21.6 | v57.97,61.28 58.35,61.66 v59.22,61.66
  Route2 0.152: v59.22,70.28 54.6,74.91 54.6,75.28 v50.72,79.16
  Bottom 0.152: v57.97,61.28 57.97,55.28 58.6,54.66 58.6,21.78 56.35,19.53 56.35,1.53 27.72,1.53 24.35,4.91 J4.04 | v59.22,70.28 v59.22,61.66
ESP3  (via drill 0.3)
  Top 0.152: IC7.7 36.6,80.03 39.1,80.03 IC7.6 39.22,79.91 39.72,79.41 v40.35,79.41 | v56.72,57.03 57.47,57.78 IC22.7 | v55.6,61.66 v41.35,61.66
  Bottom 0.152: J4.06 21.72,5.03 21.72,6.03 27.22,6.03 29.72,3.53 29.72,2.53 51.47,2.53 54.85,5.91 54.85,55.16 v56.72,57.03 56.72,60.53 v55.6,61.66 | v40.35,79.41 41.35,78.41 v41.35,61.66
ESP4  (via drill 0.3)
  Top 0.152: IC8.7 26.1,80.03 28.6,80.03 IC8.6 29.66,79.96 30.71,81.01 34.48,81.01 34.77,80.73 35.14,80.73 v35.6,80.27 | v59.22,57.03 59.35,57.03 60.1,57.78 IC22.6 | v59.22,55.41 58.97,55.66 v36.1,55.66 35.97,55.78 v24.47,55.78
  Bottom 0.152: v59.22,55.41 v59.22,57.03 | v36.1,55.66 35.85,55.91 35.85,80.02 v35.6,80.27 | v24.47,55.78 24.47,50.41 24.72,50.16 24.72,27.78 25.47,27.03 25.47,23.91 20.6,19.03 20.6,6.41 19.22,5.03 J4.08
ESP5  (via drill 0.3)
  Top 0.152: IC9.7 15.6,80.03 18.1,80.03 IC9.6 18.22,79.91 18.72,79.41 v19.35,79.41 | v17.47,46.28 18.47,46.28 18.97,46.78 IC23.7 19.1,46.91 19.72,46.91 v20.1,47.28
  Bottom 0.152: v17.47,46.28 17.22,46.03 17.22,8.41 17.72,7.91 17.72,6.03 16.72,5.03 J4.10 | v19.35,79.41 19.47,79.28 19.47,58.28 20.1,57.66 v20.1,47.28
ESP6  (via drill 0.3)
  Top 0.152: IC10.6 49.6,68.78 47.1,68.78 IC10.7 46.97,68.78 v46.97,67.41 | v17.47,47.16 18.22,47.91 20.6,47.91 21.6,46.91 IC23.6 | v46.97,46.91 45.35,45.28 v16.1,45.28
  Bottom 0.152: 15.85,45.53 15.35,45.03 15.35,6.28 14.1,5.03 J4.12 | 15.85,45.53 v17.47,47.16 | v46.97,46.91 v46.97,67.41 | 15.85,45.53 v16.1,45.28
ESP7  (via drill 0.3)
  Top 0.152: v31.97,48.41 31.6,48.03 30.72,48.03 29.6,46.91 IC24.7 | v32.1,68.53 33.6,70.03 35.47,70.03 36.47,69.03 IC11.7 36.6,69.03 39.1,69.03 IC11.6 | v14.72,43.03 16.35,44.66 v33.85,44.66
  Bottom 0.152: v32.1,68.53 32.1,48.53 v31.97,48.41 31.97,46.53 v33.85,44.66 | v14.72,43.03 14.72,42.16 12.97,40.41 12.97,6.41 11.6,5.03 J4.14
ESP8  (via drill 0.3)
  Top 0.152: IC12.7 4.85,80.03 7.22,80.03 IC12.6 7.35,79.91 7.35,78.66 v7.85,78.66 | v36.1,47.41 35.6,47.91 33.22,47.91 32.22,46.91 IC24.6 | v34.6,19.53 23.6,8.53 8.47,8.53 7.97,8.03 7.97,5.03 8.97,5.03 J4.16
  Bottom 0.152: v36.1,47.41 35.85,47.16 35.85,24.91 36.1,24.66 36.1,21.03 v34.6,19.53 | v7.85,78.66 8.47,78.03 8.47,76.78 8.35,76.66 8.35,71.03 11.1,68.28 11.1,8.53 10.1,7.53 10.1,6.03 9.1,5.03 J4.16
ESP9  (via drill 0.3)
  Top 0.152: v43.35,48.03 41.22,48.03 40.1,46.91 IC25.7 | v45.72,57.28 46.35,57.91 47.1,57.91 IC13.7 49.72,58.03 IC13.6
  Bottom 0.152: 44.1,48.78 45.72,50.41 v45.72,57.28 | 44.1,48.78 v43.35,48.03 | 44.1,48.78 44.1,33.91 50.72,27.28 50.72,6.16 52.1,4.78 J7.02
ESP10  (via drill 0.3)
  Top 0.152: IC14.7 36.6,58.03 39.1,58.03 IC14.6 39.22,58.03 v40.85,58.03 | v41.35,47.28 42.22,47.28 42.6,46.91 IC25.6
  Bottom 0.152: v40.85,58.03 40.85,47.78 v41.35,47.28 41.35,36.16 48.22,29.28 48.22,6.16 49.6,4.78 J7.04
ESP11  (via drill 0.3)
  Top 0.152: IC15.6 28.6,69.03 26.1,69.03 IC15.7 25.97,69.03 25.85,69.16 v24.97,69.16 | v18.22,34.78 18.35,34.78 18.97,35.41 IC26.7 | v19.22,32.03 20.47,30.78 v28.97,30.78
  Route15 0.152: v18.22,62.41 v24.97,69.16
  Bottom 0.152: 18.47,34.53 19.22,33.78 v19.22,32.03 | 18.47,34.53 v18.22,34.78 | v28.97,30.78 28.72,30.53 28.72,8.53 34.35,2.91 47.1,2.91 47.1,4.66 J7.06 | v18.22,62.41 18.47,62.16 18.47,34.53
ESP12  (via drill 0.3)
  Top 0.152: IC16.7 15.35,58.03 17.85,58.03 IC16.6 17.97,57.91 18.97,57.91 v19.47,57.41 | v20.72,36.16 20.97,36.16 21.6,35.53 IC26.6 | v36.85,30.28 35.72,31.41 v20.72,31.41
  Bottom 0.152: v19.47,57.41 19.47,37.41 v20.72,36.16 v20.72,31.41 | v36.85,30.28 36.85,23.41 43.1,17.16 43.1,6.16 44.47,4.78 J7.08
ESP13  (via drill 0.3)
  Top 0.152: IC17.7 15.35,69.03 17.85,69.03 IC17.6 17.97,68.91 18.47,68.41 v18.72,68.41 | v30.47,34.91 30.1,34.91 29.6,35.41 IC27.7 | v28.47,32.03 v20.1,32.03
  Bottom 0.152: v30.47,34.91 32.72,32.66 32.72,32.03 | 32.72,32.03 32.72,25.03 32.47,24.78 32.47,5.28 34.47,3.28 41.97,3.28 41.97,4.66 J7.10 | v18.72,68.41 18.85,68.28 18.85,34.66 20.1,33.41 v20.1,32.03 | 32.72,32.03 v28.47,32.03
ESP14  (via drill 0.3)
  Top 0.152: IC18.7 26.1,58.03 28.6,58.03 IC18.6 28.72,57.91 29.22,57.41 v30.35,57.41 | v32.97,34.91 32.72,34.91 32.22,35.41 IC27.6
  Bottom 0.152: J7.12 39.47,4.66 39.47,3.66 36.6,3.66 35.47,4.78 35.47,7.66 32.85,10.28 32.85,24.66 33.1,24.91 33.1,34.78 v32.97,34.91 32.97,35.16 30.97,37.16 30.97,56.78 v30.35,57.41
ESP15  (via drill 0.3)
  Top 0.152: IC19.7 4.6,68.78 7.1,68.78 IC19.6 7.22,68.78 v7.97,68.03 | v36.72,36.53 38.97,36.53 39.97,35.53 IC28.7 | v9.22,50.91 9.47,51.16 34.72,51.16 35.22,51.66 v35.97,51.66
  Bottom 0.152: J7.14 36.97,4.78 37.97,5.78 37.97,16.16 36.47,17.66 36.47,24.78 36.22,25.03 36.22,36.03 v36.72,36.53 36.72,50.91 v35.97,51.66 | v7.97,68.03 8.22,67.78 8.22,51.91 v9.22,50.91
ESP16  (via drill 0.3)
  Top 0.152: IC20.7 4.6,58.03 v6.22,58.03 7.1,58.03 IC20.6 | IC28.6 42.72,35.53 43.72,36.53 45.72,36.53 46.47,37.28 60.1,37.28 60.47,36.91 60.47,29.28 60.35,29.28 54.22,23.16 54.22,5.78 35.47,5.78 34.47,4.78 J7.16 34.35,4.66 33.6,3.91 8.6,3.91 6.97,5.53 2.35,5.53 2.35,24.41 v6.35,28.41
  Bottom 0.152: v6.22,58.03 6.35,57.91 v6.35,28.41
GND  (via drill 0.3)
  Top 0.152: J4.15 9.1,7.53 11.47,7.53 J4.13 11.6,7.53 13.97,7.53 J4.11 16.6,7.53 J4.09 16.72,7.53 19.1,7.53 J4.07 19.22,7.53 21.6,7.53 J4.05 21.72,7.53 24.22,7.53 J4.03 24.35,7.53 26.72,7.53 J4.01 26.85,7.53 26.97,7.41 34.35,7.41 J7.15 34.47,7.28 36.85,7.28 J7.13 36.97,7.28 39.47,7.28 J7.11 39.6,7.28 41.97,7.28 J7.09 42.1,7.28 44.47,7.28 J7.07 44.6,7.28 47.1,7.28 J7.05 47.22,7.28 49.6,7.28 J7.03 49.72,7.41 51.35,7.41 | 51.35,7.41 51.35,11.53 | 51.35,11.53 51.35,12.03 R71.1 | 51.35,7.41 52.1,7.41 J7.01 | 38.85,27.78 35.85,27.78 34.72,26.66 IC27.4 | 38.85,27.78 39.97,26.66 IC28.2 40.1,26.53 41.85,24.78 41.85,22.53 | 38.85,27.78 43.97,27.78 45.1,26.66 IC28.4 | 51.35,15.03 51.35,13.53 R70.1 | 51.35,15.03 51.35,16.03 | 51.35,16.03 51.35,16.53 R68.1 | 51.35,15.03 R69.1 | 51.35,20.03 51.35,21.03 R65.1 51.22,21.03 49.85,22.41 42.85,22.41 R72.1 42.85,22.53 41.85,22.53 | 51.35,20.03 51.35,19.53 R66.1 | 39.1,21.66 38.35,22.41 R75.1 38.35,22.53 36.85,22.53 | 39.1,21.66 42.1,18.66 50.6,18.66 51.22,18.03 R67.1 | 39.1,21.66 39.85,22.41 R74.1 39.85,22.53 41.35,22.53 | 41.35,22.53 41.85,22.53 | 41.35,22.53 R73.1 | 52.85,16.03 51.35,16.03 | 52.85,16.03 53.72,16.91 53.72,20.03 51.35,20.03 | 23.35,22.53 21.85,22.53 | 23.35,22.53 24.22,22.53 | 24.22,22.53 24.85,22.53 | 23.35,22.53 R85.1 | 24.85,22.53 26.35,22.53 | 24.85,22.53 R84.1 | 26.35,22.53 27.85,22.53 | 26.35,22.53 R83.1 | 27.85,22.53 29.35,22.53 | 27.85,22.53 R82.1 | 29.35,22.53 30.85,22.53 | 29.35,22.53 R81.1 | 30.85,22.53 32.35,22.53 | 30.85,22.53 R80.1 | 32.35,22.53 33.85,22.53 | 32.35,22.53 R79.1 | 33.85,22.53 35.35,22.53 | 33.85,22.53 R78.1 | 20.35,22.53 R87.1 20.35,24.53 19.1,24.53 19.1,25.53
  Top 0.152: 21.85,22.53 20.35,22.53 | 21.85,22.53 R86.1 | 35.35,22.53 36.85,22.53 | 35.35,22.53 R77.1 | 20.35,22.53 13.47,15.66 6.72,15.66 4.85,17.53 4.1,17.53 3.85,17.78 POWER.1 | 19.1,25.53 19.1,26.53 IC26.2 | 24.22,22.53 24.22,26.53 IC26.4 24.1,26.66 25.6,28.16 27.97,28.16 29.47,26.66 IC27.2 | 36.85,22.53 R76.1 | 51.35,11.53 52.85,11.53 53.85,12.53 53.85,16.03 52.85,16.03 | 23.1,39.03 24.1,38.03 IC23.4 | 23.1,39.03 22.85,39.28 20.35,39.28 19.1,38.03 IC23.2 18.97,38.03 15.85,41.16 13.97,41.16 7.1,48.03 | 23.1,39.03 28.47,39.03 29.47,38.03 IC24.2 29.6,38.03 30.72,39.16 33.47,39.16 | 33.47,39.16 34.6,38.03 IC24.4 | 33.47,39.16 38.85,39.16 39.97,38.03 IC25.2 40.1,37.91 41.1,36.91 44.1,36.91 45.1,37.91 IC25.4 | R64.1 68.35,47.53 68.35,49.03 R63.1 v67.47,49.03 62.72,49.03 IC22.4 62.6,49.03 61.6,50.03 56.47,50.03 | 56.47,50.03 57.47,49.03 IC22.2 | 56.47,50.03 53.1,50.03 52.35,49.28 IC13.4 52.22,49.16 51.1,48.03 48.35,48.03 47.22,49.16 IC13.2 47.1,49.28 45.85,50.53 43.1,50.53 41.72,49.16 IC14.4 41.6,49.03 40.6,48.03 37.6,48.03 36.6,49.03 IC14.2 36.47,49.16 35.1,50.53 32.6,50.53 31.22,49.16 IC18.4 31.1,49.16 29.97,50.28 27.22,50.28 26.1,49.16 IC18.2 25.97,49.03 24.97,48.03 21.47,48.03 20.47,49.03 IC16.4 20.35,49.16 19.22,50.28 16.47,50.28 | 7.1,48.03 8.6,48.03 9.6,49.03 IC20.4 9.72,49.16 10.85,50.28 16.47,50.28 | 7.1,48.03 5.6,48.03 4.6,49.03 IC20.2 4.47,49.03 3.85,49.03 3.85,31.78 10.1,25.53 19.1,25.53 | 16.47,50.28 15.35,49.16 IC16.2 | 16.22,85.66 23.47,85.66 23.97,85.16 R2.1 | 16.22,85.66 15.97,85.41 R1.1 | 10.35,86.66 10.1,86.91 9.97,86.91 9.72,87.16 9.72,87.79 11.08,89.15 12.84,89.15 12.98,89 13.88,89 14.1,88.78 U2.4 16.22,88.78
  Top 0.152: 16.22,88.78 16.6,88.78 16.85,88.53 C4.1 | 16.22,88.78 16.22,85.66 | 15.85,93.53 16.1,93.53 16.35,93.28 16.72,93.28 16.85,93.16 C3.1 | v11.47,93.91 10.72,93.91 10.35,93.53 C1.1 | v11.72,96.03 11.97,96.28 14.1,96.28 IC1.10 14.22,96.28 15.6,96.28 v15.85,96.03 | v12.47,83.78 6.35,83.78 6.35,84.53 R55.1 | v11.47,86.66 10.35,86.66 | 10.35,86.66 C2.1 | C9.1 40.85,92.03 40.97,91.91 v41.72,91.91 42.72,91.91 42.85,91.78 U11.4 42.97,91.78 43.35,91.41 47.35,91.41 | 47.35,91.41 47.35,91.28 48.85,91.28 49.35,91.78 U13.4 | 47.35,91.41 C11.1 | 36.35,86.41 35.6,85.66 33.97,85.66 33.85,85.53 33.35,85.53 33.35,85.16 R3.1 | 36.35,86.41 36.35,87.28 U10.4 | 54.1,91.78 53.85,92.03 C13.1 | U15.4 54.1,91.78 | 54.1,87.28 53.85,87.53 C14.1 | U16.4 54.47,87.28 | 54.47,87.28 54.1,87.28 | 47.72,87.16 47.35,87.53 C12.1 | 47.72,87.16 49.22,87.16 49.35,87.28 U14.4 50.1,87.28 51.1,86.28 54.1,86.28 54.1,87.28 | 42.6,87.28 U12.4 42.85,87.28 | 42.6,87.28 41.72,87.28 | 41.72,87.28 41.1,87.28 40.85,87.53 C10.1 | 42.6,85.78 42.6,85.53 | 42.6,85.53 42.6,85.16 R4.1 | 47.72,87.16 47.72,85.78 42.6,85.78 | 54.1,91.78 54.1,91.16 53.72,90.78 53.72,89.03 54.1,89.03 54.47,88.66 54.47,87.28 | 41.72,87.28 v41.72,88.03 | U7.4 34.97,93.28 35.35,93.66 35.35,94.78 | 35.35,94.78 37.35,94.78 38.35,95.78 | 38.35,95.78 38.85,96.28 39.1,96.28 IC3.10 39.22,96.28 v41.72,93.78 | 35.35,94.78 28.72,94.78 27.22,96.28 IC2.10 27.1,96.28 25.35,94.53 24.47,94.53 24.1,94.16 24.1,93.28 23.1,93.28 | 28.85,93.16 27.97,93.16 27.85,93.28 U5.4 | 28.85,93.16 29.72,93.16 29.85,93.03 C7.1 | 23.1,93.28 23.35,93.03 C5.1 | U3.4 22.72,93.28 | 22.72,93.28 23.1,93.28
  Top 0.152: 23.35,88.53 23.1,88.78 U4.4 | C8.1 29.22,88.91 28.85,88.91 | 28.85,88.91 28.6,88.91 28.47,88.78 U6.4 27.1,88.78 26.72,89.16 25.35,89.16 | C8.1 31.6,90.03 32.47,90.03 33.47,89.03 33.97,89.03 34.22,88.78 U8.4 | C8.1 | 23.35,88.53 23.97,89.16 25.35,89.16 | 23.35,88.53 C6.1 | 22.72,93.28 22.72,90.53 23.97,90.53 25.35,89.16 | v28.85,92.91 28.85,93.16 | 28.85,88.91 v28.85,90.91 | 20.72,110.78 19.6,111.91 J3.6 | 20.72,110.78 28.47,110.78 29.6,111.91 J3.14 | v38.35,91.28 38.22,91.41 36.85,91.41 36.47,91.78 U9.4 | J3.20 38.6,113.28 42.85,113.28 42.97,113.41 43.72,113.41 44.85,114.53 J3.25 44.97,114.53 46.22,113.28 48.35,113.28 49.6,112.03 49.97,112.03 J3.30 50.1,111.91 51.22,110.78 53.97,110.78 55.1,111.91 J3.34 55.22,111.91 56.35,110.78 66.6,110.78 | v38.72,95.41 38.35,95.78 | v16.35,110.16 16.97,110.78 20.72,110.78 | 14.1,72.53 15.47,71.16 IC9.2 | 14.1,72.53 11.22,72.53 9.85,71.16 IC12.4 9.72,71.03 8.72,70.03 5.85,70.03 4.85,71.03 IC12.2 | 20.22,71.53 19.22,72.53 14.1,72.53 | 20.22,71.53 20.6,71.16 IC9.4 | 26.35,71.41 27.22,72.28 29.97,72.28 | 26.35,71.41 26.1,71.16 IC8.2 26.35,71.41 | 29.97,72.28 31.1,71.16 IC8.4 | 35.35,72.28 36.47,71.16 IC7.2 | 29.97,72.28 35.35,72.28 | 40.47,72.28 41.6,71.16 IC7.4 | 35.35,72.28 40.47,72.28 | 45.85,72.28 46.97,71.16 IC6.2 | 40.47,72.28 45.85,72.28 | 51.1,72.16 50.97,72.28 45.85,72.28 | 51.1,72.16 52.1,71.16 IC6.4 | 51.1,72.16 56.35,72.16 57.47,71.03 IC5.2 57.6,71.03 58.97,72.41 61.22,72.41 62.6,71.03 IC5.4 62.72,71.03 63.35,71.66 67.1,71.66 68.1,70.66 69.22,70.66 JP4.32 | 20.22,71.53 21.22,72.53 25.22,72.53 26.35,71.41 | JP4.12 69.35,96.03 69.35,98.41 JP4.10 69.35,98.53 69.35,101.03 JP4.8 69.35,101.16 69.35,103.53 JP4.6 69.35,103.66 69.35,106.03 JP4.4 69.35,106.16 69.35,108.66 JP4.2 69.22,108.78 68.35,109.66 67.72,109.66 66.6,110.78
  Top 0.152: 66.6,110.78 62.85,114.53 J3.39 | 64.47,87.41 66.22,87.41 66.35,87.28 67.85,87.28 | 64.47,87.41 60.47,87.41 60.35,87.53 C16.1 | 67.85,87.28 68.22,87.28 69.22,88.28 JP4.18 69.35,88.41 69.35,90.78 JP4.16 69.35,90.91 69.35,93.41 JP4.14 | 62.47,91.91 60.47,91.91 60.35,92.03 C15.1 | 62.47,91.91 64.47,89.91 64.47,87.41 | 62.47,91.91 62.97,91.91 62.97,92.91 61.22,94.66 56.97,94.66 55.85,95.78 51.85,95.78 51.35,96.28 IC4.10 | 67.85,87.28 69.22,85.91 JP4.20 | 9.35,60.28 9.6,60.03 IC19.4 9.35,60.28 | 9.35,60.28 8.6,61.03 5.6,61.03 4.6,60.03 IC19.2 | 16.72,61.53 15.35,60.16 IC17.2 | 16.72,61.53 18.97,61.53 19.22,61.28 | 19.22,61.28 20.35,60.16 IC17.4 | 25.97,61.28 25.97,60.16 IC15.2 | 19.22,61.28 25.97,61.28 | 31.1,61.28 31.1,60.16 IC15.4 | 25.97,61.28 31.1,61.28 | 35.35,61.28 36.47,60.16 IC11.2 | 31.1,61.28 35.35,61.28 | 41.35,60.41 40.47,61.28 35.35,61.28 | 41.35,60.41 41.6,60.16 IC11.4 41.35,60.41 | 9.35,60.28 10.6,61.53 16.72,61.53 | JP4.32 69.35,70.53 69.35,68.16 JP4.34 69.35,68.03 69.35,65.53 JP4.36 69.35,65.41 69.35,63.03 JP4.38 | JP4.32 69.35,70.66 69.35,73.03 JP4.30 69.35,73.16 69.35,75.66 JP4.28 69.35,75.78 69.35,78.16 JP4.26 69.35,78.28 69.35,80.66 JP4.24 69.35,80.78 69.35,83.28 JP4.22 | 51.1,61.03 48.1,61.03 47.1,60.03 IC10.2 46.97,60.03 45.72,61.28 42.22,61.28 41.35,60.41 | 51.1,61.03 52.1,60.03 IC10.4 | 51.1,61.03 56.35,61.03 57.47,59.91 IC21.2 57.6,59.91 58.72,61.03 61.6,61.03 62.72,59.91 IC21.4 62.72,59.78 65.97,56.53 68.22,56.53 | 68.72,55.53 70.35,55.53 70.35,52.91 70.1,52.66 68.35,52.66 68.35,52.03 R61.1 | 68.22,55.03 68.72,55.53 | 68.22,55.03 67.97,55.03 67.97,54.03 68.22,53.78 68.22,53.53 R60.1
  Top 0.152: 68.22,55.03 R58.1 | 68.72,55.53 68.35,55.53 68.35,56.53 R57.1 68.22,56.53 | v67.47,50.66 68.1,50.66 68.22,50.53 R62.1 | JP4.40 69.22,60.41 68.35,60.41 68.35,58.03 R56.1 67.97,58.03 67.97,57.03 68.22,56.78 68.22,56.53 | 15.85,93.53 15.14,93.53 14.89,93.28 U1.4 | v15.95,93.78 15.85,93.68 15.85,93.53 | 36.35,86.41 36.79,85.96 36.79,85.8 37.37,85.23 39.37,85.23 39.62,84.98 41.55,84.98 42.1,85.53 42.6,85.53 | 42.6,87.28 42.6,87.07 42.29,86.76 42.29,86.3 42.6,86 42.6,85.78
  Bottom 0.152: v11.72,96.03 11.72,94.16 v11.47,93.91 v11.47,86.66 11.47,83.78 v12.47,83.78 | v41.72,88.03 v41.72,91.91 v41.72,93.78 | v28.85,90.91 v28.85,92.91 | 28.47,115.78 28.47,113.78 29.6,112.66 29.6,112.03 J3.14 | 28.47,115.78 28.47,115.91 25.97,115.91 24.72,114.66 J3.9 | v38.35,91.28 38.85,91.78 38.85,95.41 | 38.85,95.41 38.85,110.03 37.35,111.53 37.35,111.91 J3.20 37.22,112.03 36.1,113.16 36.1,115.78 28.47,115.78 | 38.85,95.41 v38.72,95.41 | v16.35,110.16 16.35,96.53 v15.85,96.03 15.85,93.88 v15.95,93.78 | JP4.14 69.35,93.53 69.35,95.91 JP4.12 | JP4.22 69.35,83.41 69.35,85.78 JP4.20 | JP4.38 69.35,62.91 69.35,60.53 JP4.40 69.22,60.41 69.22,52.41 v67.47,50.66 v67.47,49.03
GND-CTRL1  (via drill 0.3)
  Top 0.152: v15.85,92.91 15.72,92.78 U1.3 | v13.2,89.53 R22.2
  Route2 0.152: v15.85,92.91 14.22,91.28 14.22,90.55 v13.2,89.53
GND-CTRL2
  Top 0.152: R23.2 3.85,88.03 4.85,87.03 4.85,86.53 8.85,86.53 8.85,86.03 12.48,86.03 13.96,87.52 13.96,87.99 14.12,88.15 14.62,88.15 U2.3
GND-CTRL3  (via drill 0.3)
  Top 0.152: v4.72,90.16 v20.22,90.16 | v20.22,91.91 20.22,92.78 U3.3 | R24.2 2.97,86.53 3.41,86.97 v4.16,86.97
  Bottom 0.152: v4.72,90.16 4.72,87.53 v4.16,86.97 | v20.22,91.91 v20.22,90.16
GND-CTRL4  (via drill 0.3)
  Top 0.152: v15.1,110.66 14.35,109.91 10.6,109.91 10.47,110.03 R25.2 | U4.3 20.35,88.28 v20.28,88.35
  Bottom 0.152: v15.1,110.66 15.72,111.28 15.72,112.41 16.6,113.28 18.35,113.28 18.35,111.03 21.35,108.03 21.35,96.53 21.1,96.28 21.1,92.41 21.47,92.03 21.47,89.66 20.28,88.47 v20.28,88.35
GND-CTRL5  (via drill 0.3)
  Top 0.152: v22.97,109.41 21.47,109.41 21.1,109.03 10.97,109.03 10.47,108.53 R26.2 | v25.97,92.41 26.35,92.78 U5.3
  Bottom 0.152: v22.97,109.41 26.22,109.41 26.22,92.66 v25.97,92.41
GND-CTRL6  (via drill 0.3)
  Top 0.152: v29.1,107.03 25.97,107.03 24.85,105.91 11.6,105.91 10.47,107.03 R27.2 | U6.3 v28.97,88.28
  Bottom 0.152: v29.1,107.03 29.22,106.91 29.22,93.41 29.47,93.16 29.47,88.78 v28.97,88.28
GND-CTRL7  (via drill 0.3)
  Top 0.152: v30.97,102.03 20.1,102.03 20.1,102.66 19.47,103.28 12.72,103.28 10.47,105.53 R28.2 | v32.47,92.66 32.6,92.78 U7.3
  Bottom 0.152: v30.97,102.03 31.85,101.16 31.85,93.28 v32.47,92.66
GND-CTRL8  (via drill 0.3)
  Top 0.152: v8.47,104.53 10.35,104.53 10.35,104.03 R29.2 | v10.22,77.03 10.35,76.91 25.47,76.91 25.97,76.41 28.35,76.41 28.6,76.16 v32.47,76.16 | v31.85,89.41 31.97,89.28 32.72,89.28 33.72,88.28 U8.3
  Bottom 0.152: v8.47,104.53 9.72,103.28 9.72,91.53 9.47,91.28 9.47,84.16 10.35,83.28 10.35,77.16 v10.22,77.03 | v32.47,76.16 32.72,76.41 32.72,87.53 31.85,88.41 v31.85,89.41
GND-CTRL9  (via drill 0.3)
  Top 0.152: v8.47,101.53 9.22,101.53 9.85,102.16 10.35,102.16 10.35,102.53 R30.2 | v9.1,98.78 9.35,98.53 10.96,98.53 11.02,98.48 12.78,98.48 13.1,98.16 18.85,98.16 20.1,96.91 29.1,96.91 30.35,95.66 35.35,95.66 v35.6,95.41 | v37.47,92.41 37.35,92.28 U9.3
  Bottom 0.152: v8.47,101.53 9.1,100.91 v9.1,98.78 | v35.6,95.41 36.47,94.53 37.47,94.53 v37.47,92.41
GND-CTRL10  (via drill 0.3)
  Top 0.152: v18.22,101.66 17.85,102.03 13.1,102.03 12.85,101.78 10.47,101.78 10.47,101.03 R31.2 | v35.35,90.28 35.35,87.78 U10.3
  Route2 0.152: v18.22,101.66 18.85,101.66 24.47,96.03 29.97,96.03 35.35,90.66 v35.35,90.28
GND-CTRL11  (via drill 0.3)
  Top 0.152: v18.85,109.66 19.35,110.16 v31.35,110.16 | v38.1,94.66 39.1,93.66 40.97,93.66 42.35,92.28 U11.3 | v18.22,99.53 12.95,99.53 12.9,99.59 11.02,99.59 10.96,99.53 R32.2
  Bottom 0.152: v18.22,99.53 18.85,100.16 v18.85,109.66 | v31.35,110.16 31.6,109.91 31.6,108.41 38.1,101.91 v38.1,94.66
GND-CTRL12  (via drill 0.35)
  Top 0.152: R33.2 10.85,98.03 v11.35,97.53 | v11.25,99.03 v12.67,99.03 | v15.35,89.53 v18.85,89.53 | v19.85,83.03 19.85,82.03 20.71,82.03 20.75,82.08 21.3,82.08 22.35,81.03 30.3,81.03 30.59,81.32 34.61,81.32 34.87,81.06 v35.82,81.06 | U12.3 43.6,87.78 43.85,87.53 43.85,86.53 v42.85,86.53 | v37.35,86.03 38.35,86.03 38.85,85.53 v39.85,85.53 | v40.35,83.03 42.35,83.03 42.69,83.37 v42.69,83.69
  Bottom 0.152: v12.67,99.03 14.35,97.35 14.35,89.53 v15.35,89.53 | v11.35,97.53 11.35,98.94 v11.25,99.03 | v18.85,89.53 18.85,85.53 19.85,84.53 20.85,84.53 20.85,83.03 v19.85,83.03 | v35.82,81.06 35.82,82.51 37.35,84.03 v37.35,86.03 | v39.85,85.53 39.85,83.53 v40.35,83.03 | v42.69,83.69 42.85,83.86 v42.85,86.53
GND-CTRL13  (via drill 0.3)